# EAGLE board panel-100x70 (EAGLE 6.5.0)
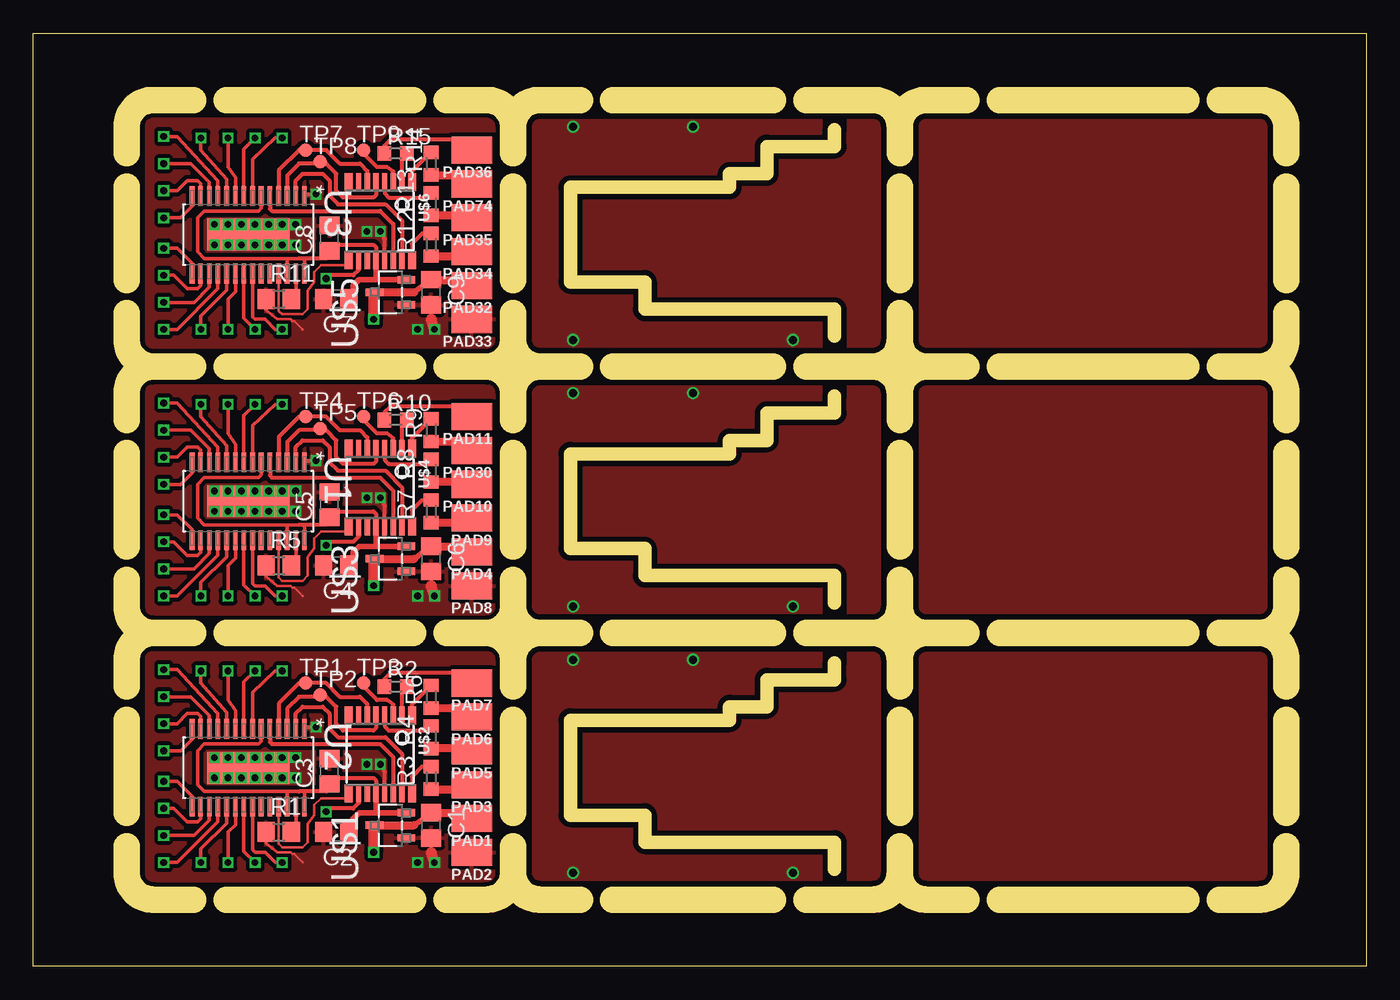
[diagram p0: board, top side]
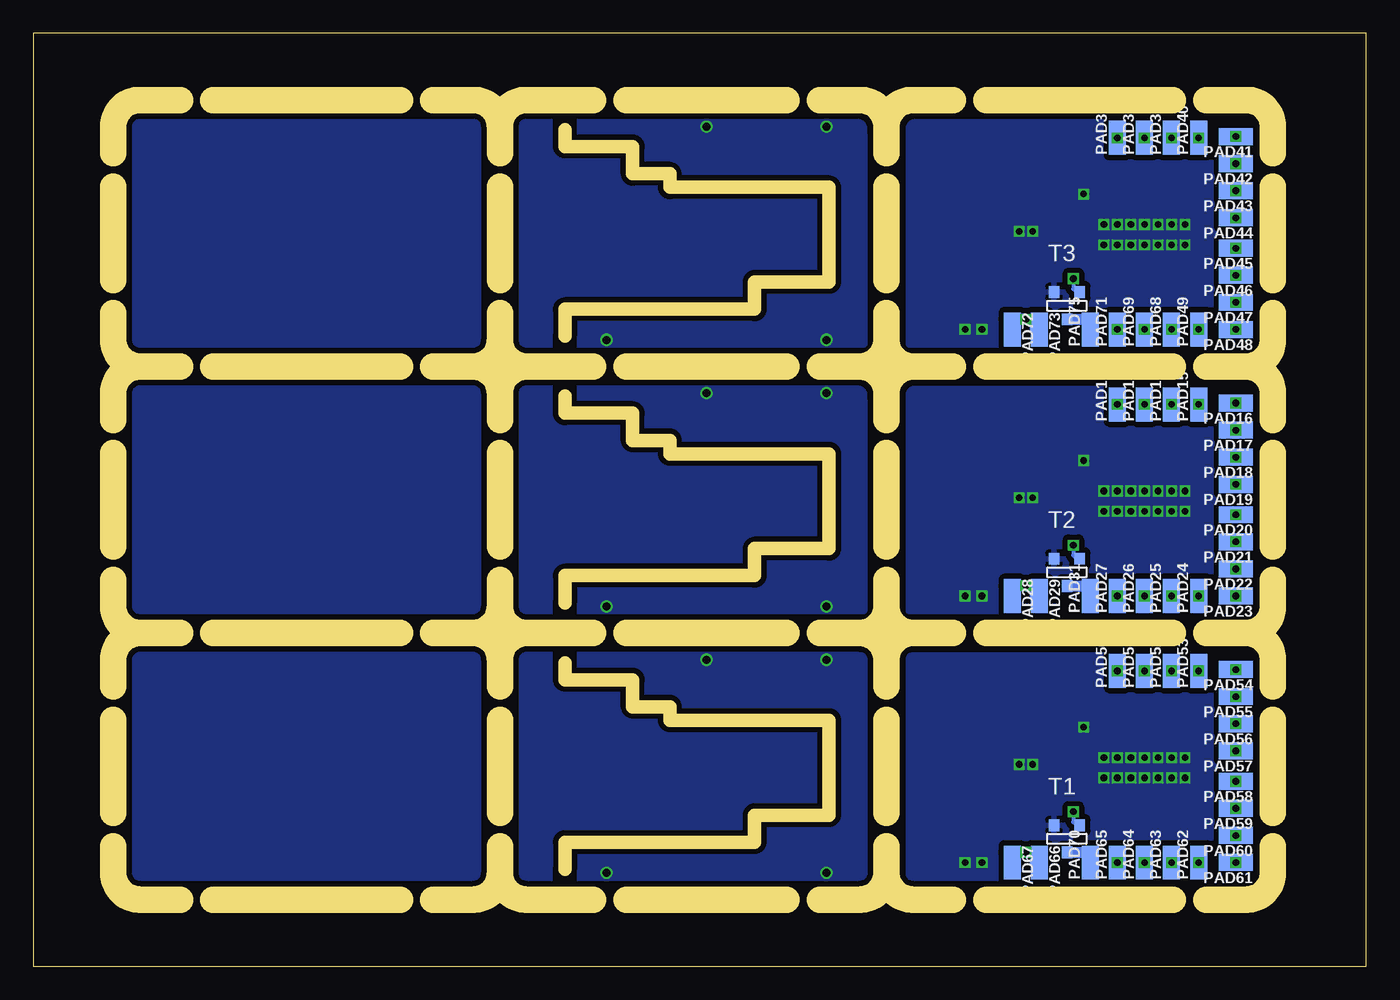
[diagram p1: board, bottom side, seen from below]

Size 100 x 70 mm. Coordinates in mm from the lower left corner, seen from the top.
Outline: 0,0 0,70 100,70 100,0 0,0
Copper layers (1*16): Top 0.035mm / dielectric 1.5mm / Bottom 0.035mm
Design rules "smart-prototyping": minimum track width 7mil, minimum drill 12mil, track to track 7mil, track to pad 7mil, pad to pad 7mil, via to via 7mil, smd to smd 0mil, copper to edge 20mil, drill to drill 10mil, minimum pad ring 10mil, minimum via ring 6mil, stop-mask expansion 2mil, vias tented up to drill 25mil, thermal gap 10mil
tRestrict: 93 lines
bRestrict: 93 lines
Milling: 141 lines

## Footprints (pad centres in the part's own frame; a part is rotated, then mirrored left to right if it is on the bottom)
C0805 = smd 1.3 x 1.5: 1 -0.95,0; 2 0.95,0
SMD80X120 = smd 2.032 x 3.048: 1 0,0
SMD50X100 = smd 1.27 x 2.54: 1 0,0
R0805 = smd 1.3 x 1.5: 1 -0.95,0; 2 0.95,0
R0603 = smd 1 x 1.1: 1 -0.85,0; 2 0.85,0
SOT-23 = smd 0.787 x 0.889: 1 0.025,-1.016; 2 -0.94,1.016; 3 0.991,1.016
TP10R = smd 1 x 1: TP 0,0
SOP65P640X120-29N = smd 1.473 x 0.356: 1 -2.921,4.216; 2 -2.921,3.581; 3 -2.921,2.921; 4 -2.921,2.286; 5 -2.921,1.626; 6 -2.921,0.965; 7 -2.921,0.33; 8 -2.921,-0.33; 9 -2.921,-0.965; 10 -2.921,-1.626; 11 -2.921,-2.286; 12 -2.921,-2.921; 13 -2.921,-3.581; 14 -2.921,-4.216; 15 2.921,-4.216; 16 2.921,-3.581; 17 2.921,-2.921; 18 2.921,-2.286; 19 2.921,-1.626; 20 2.921,-0.965; 21 2.921,-0.33; 22 2.921,0.33; 23 2.921,0.965; 24 2.921,1.626; 25 2.921,2.286; 26 2.921,2.921; 27 2.921,3.581; 28 2.921,4.216 | smd 2.388 x 6.172: 29 0,0
SOT95P300X145-3N = smd 0.559 x 1.321: 1 -0.94,-1.194; 2 0.94,-1.194; 3 0,1.194
TSSOP16 = smd 0.6 x 1.35: 1 -2.375,-2.925; 8 2.375,-2.925; 9 2.375,2.925; 16 -2.375,2.925 | smd 0.4 x 1.35: 2 -1.625,-2.918; 3 -0.975,-2.918; 4 -0.325,-2.918; 5 0.325,-2.918; 6 0.975,-2.918; 7 1.625,-2.918; 10 1.625,2.918; 11 0.975,2.918; 12 0.325,2.918; 13 -0.325,2.918; 14 -0.975,2.925; 15 -1.625,2.925

## Placement (x,y rotation side)
C1  1u  [C0805]  29.84,10.57 270 top
C2  1u  [C0805]  22.73,10.06 180 top
C3  100n  [C0805]  22.22,14.64 90 top
C4  1u  [C0805]  22.73,30.06 180 top
C5  100n  [C0805]  22.22,34.64 90 top
C6  1u  [C0805]  29.84,30.57 270 top
C7  1u  [C0805]  22.73,50.06 180 top
C8  100n  [C0805]  22.22,54.64 90 top
C9  1u  [C0805]  29.84,50.57 270 top
PAD1  +  [SMD80X120]  32.89,11.08 90 top
PAD2  -  [SMD80X120]  32.89,8.54 90 top
PAD3  ST/Rx  [SMD80X120]  32.89,13.62 90 top
PAD4  +  [SMD80X120]  32.89,31.08 90 top
PAD5  TH/Tx  [SMD80X120]  32.89,16.16 90 top
PAD6  CH3  [SMD80X120]  32.89,18.7 90 top
PAD7  OUT/ISP  [SMD80X120]  32.89,21.24 90 top
PAD8  -  [SMD80X120]  32.89,28.54 90 top
PAD9  ST/Rx  [SMD80X120]  32.89,33.62 90 top
PAD10  TH/Tx  [SMD80X120]  32.89,36.16 90 top
PAD11  OUT/ISP  [SMD80X120]  32.89,41.24 90 top
PAD12  [SMD50X100]  18.67,42.16 0 bottom
PAD13  [SMD50X100]  16.64,42.16 0 bottom
PAD14  [SMD50X100]  14.6,42.16 0 bottom
PAD15  [SMD50X100]  12.57,42.16 0 bottom
PAD16  [SMD50X100]  9.78,42.26 90 bottom
PAD17  [SMD50X100]  9.78,40.22 90 bottom
PAD18  [SMD50X100]  9.78,38.19 90 bottom
PAD19  [SMD50X100]  9.78,36.16 90 bottom
PAD20  [SMD50X100]  9.78,33.87 90 bottom
PAD21  [SMD50X100]  9.78,31.84 90 bottom
PAD22  [SMD50X100]  9.78,29.81 90 bottom
PAD23  [SMD50X100]  9.78,27.78 90 bottom
PAD24  [SMD50X100]  12.57,27.78 0 bottom
PAD25  [SMD50X100]  14.6,27.78 0 bottom
PAD26  [SMD50X100]  16.64,27.78 0 bottom
PAD27  [SMD50X100]  18.67,27.78 0 bottom
PAD28  [SMD50X100]  26.55,27.78 180 bottom
PAD29  [SMD50X100]  24.51,27.78 180 bottom
PAD30  CH3  [SMD80X120]  32.89,38.7 90 top
PAD31  [SMD50X100]  20.7,27.78 0 bottom
PAD32  +  [SMD80X120]  32.89,51.08 90 top
PAD33  -  [SMD80X120]  32.89,48.54 90 top
PAD34  ST/Rx  [SMD80X120]  32.89,53.62 90 top
PAD35  TH/Tx  [SMD80X120]  32.89,56.16 90 top
PAD36  OUT/ISP  [SMD80X120]  32.89,61.24 90 top
PAD37  [SMD50X100]  18.67,62.16 0 bottom
PAD38  [SMD50X100]  16.64,62.16 0 bottom
PAD39  [SMD50X100]  14.6,62.16 0 bottom
PAD40  [SMD50X100]  12.57,62.16 0 bottom
PAD41  [SMD50X100]  9.78,62.26 90 bottom
PAD42  [SMD50X100]  9.78,60.22 90 bottom
PAD43  [SMD50X100]  9.78,58.19 90 bottom
PAD44  [SMD50X100]  9.78,56.16 90 bottom
PAD45  [SMD50X100]  9.78,53.87 90 bottom
PAD46  [SMD50X100]  9.78,51.84 90 bottom
PAD47  [SMD50X100]  9.78,49.81 90 bottom
PAD48  [SMD50X100]  9.78,47.78 90 bottom
PAD49  [SMD50X100]  12.57,47.78 0 bottom
PAD50  [SMD50X100]  18.67,22.16 0 bottom
PAD51  [SMD50X100]  16.64,22.16 0 bottom
PAD52  [SMD50X100]  14.6,22.16 0 bottom
PAD53  [SMD50X100]  12.57,22.16 0 bottom
PAD54  [SMD50X100]  9.78,22.26 90 bottom
PAD55  [SMD50X100]  9.78,20.22 90 bottom
PAD56  [SMD50X100]  9.78,18.19 90 bottom
PAD57  [SMD50X100]  9.78,16.16 90 bottom
PAD58  [SMD50X100]  9.78,13.87 90 bottom
PAD59  [SMD50X100]  9.78,11.84 90 bottom
PAD60  [SMD50X100]  9.78,9.81 90 bottom
PAD61  [SMD50X100]  9.78,7.78 90 bottom
PAD62  [SMD50X100]  12.57,7.78 0 bottom
PAD63  [SMD50X100]  14.6,7.78 0 bottom
PAD64  [SMD50X100]  16.64,7.78 0 bottom
PAD65  [SMD50X100]  18.67,7.78 0 bottom
PAD66  [SMD50X100]  24.51,7.78 180 bottom
PAD67  [SMD50X100]  26.55,7.78 180 bottom
PAD68  [SMD50X100]  14.6,47.78 0 bottom
PAD69  [SMD50X100]  16.64,47.78 0 bottom
PAD70  [SMD50X100]  20.7,7.78 0 bottom
PAD71  [SMD50X100]  18.67,47.78 0 bottom
PAD72  [SMD50X100]  26.55,47.78 180 bottom
PAD73  [SMD50X100]  24.51,47.78 180 bottom
PAD74  CH3  [SMD80X120]  32.89,58.7 90 top
PAD75  [SMD50X100]  20.7,47.78 0 bottom
R1  2k0=20mA  [R0805]  18.41,10.06 0 top
R2  1k  [R0603]  27.18,20.99 0 top
R3  1k  [R0603]  29.84,14.13 90 top
R4  1k  [R0603]  29.84,17.18 90 top
R5  2k0=20mA  [R0805]  18.41,30.06 0 top
R6  1k  [R0603]  29.84,20.22 90 top
R7  1k  [R0603]  29.84,34.13 90 top
R8  1k  [R0603]  29.84,37.18 90 top
R9  1k  [R0603]  29.84,40.22 90 top
R10  1k  [R0603]  27.18,40.99 0 top
R11  2k0=20mA  [R0805]  18.41,50.06 0 top
R12  1k  [R0603]  29.84,54.13 90 top
R13  1k  [R0603]  29.84,57.18 90 top
R14  1k  [R0603]  29.84,60.22 90 top
R15  1k  [R0603]  27.18,60.99 0 top
T1  [SOT-23]  22.48,9.56 0 bottom
T2  [SOT-23]  22.48,29.56 0 bottom
T3  [SOT-23]  22.48,49.56 0 bottom
TP1  SWDIO  [TP10R]  20.45,21.24 0 top
TP2  SWCLK  [TP10R]  21.53,20.35 0 top
TP3  RESET  [TP10R]  24.76,21.24 0 top
TP4  SWDIO  [TP10R]  20.45,41.24 0 top
TP5  SWCLK  [TP10R]  21.53,40.35 0 top
TP6  RESET  [TP10R]  24.76,41.24 0 top
TP7  SWDIO  [TP10R]  20.45,61.24 0 top
TP8  SWCLK  [TP10R]  21.53,60.35 0 top
TP9  RESET  [TP10R]  24.76,61.24 0 top
U1  TLC5940PWP  [SOP65P640X120-29N]  16.13,34.89 270 top
U2  TLC5940PWP  [SOP65P640X120-29N]  16.13,14.89 270 top
U3  TLC5940PWP  [SOP65P640X120-29N]  16.13,54.89 270 top
U$1  3V3  [SOT95P300X145-3N]  26.8,10.57 90 top
U$2  LPC812  [TSSOP16]  26.03,15.91 180 top
U$3  3V3  [SOT95P300X145-3N]  26.8,30.57 90 top
U$4  LPC812  [TSSOP16]  26.03,35.91 180 top
U$5  3V3  [SOT95P300X145-3N]  26.8,50.57 90 top
U$6  LPC812  [TSSOP16]  26.03,55.91 180 top

## Library data of the parts
C1-C9 R1-R15 = rcl
PAD1-PAD75 = wirepad
T1-T3 = zetex; OC_FARNELL: unknown; OC_NEWARK: unknown
TP1-TP9 = testpad
U1-U3 = tlc5940; MPN: TLC5940PWP; PACKAGE: HTSSOP-28; SUPPLIER: Texas Instruments
U$1 U$3 U$5 = MCP1703; MPN: MCP1703T-3302E/CB; OC_FARNELL: 1439518; OC_NEWARK: 40M0637; PACKAGE: SOT-3; SUPPLIER: Microchip
U$2 U$4 U$6 = LPC810

## Nets
+3V1: C4.1 C5.1 U1.6 U1.26 U1.28 U$3.2 U$4.12
+3V2: C7.1 C8.1 U3.6 U3.26 U3.28 U$5.2 U$6.12
+3V3: C2.1 C3.1 U2.6 U2.26 U2.28 U$1.2 U$2.12
BLANK: U2.2 U$2.15
BLANK1: U1.2 U$4.15
BLANK2: U3.2 U$6.15
CH1: R9.2 U$4.1
CH2: R14.2 U$6.1
CH3: R6.2 U$2.1
GND3: C1.2 C2.2 C3.2 PAD2.1 R1.1 T1.2 U2.1 U2.29 U$1.1 U$2.13
GND4: C4.2 C5.2 C6.2 PAD8.1 R5.1 T2.2 U1.1 U1.29 U$3.1 U$4.13
GND5: C7.2 C8.2 C9.2 PAD33.1 R11.1 T3.2 U3.1 U3.29 U$5.1 U$6.13
GSCLK: U2.25 U$2.9
GSCLK1: U1.25 U$4.9
GSCLK2: U3.25 U$6.9
IREF: R1.2 U2.27
IREF1: R5.2 U1.27
IREF2: R11.2 U3.27
N$1: PAD6.1 R6.1
N$2: PAD9.1 R7.1
N$3: PAD70.1 T1.1
N$4: TP3.TP U$2.3
N$5: PAD7.1 R2.1
N$6: PAD10.1 R8.1
N$7: PAD30.1 R9.1
N$8: TP6.TP U$4.3
N$9: PAD31.1 T2.1
N$10: PAD11.1 R10.1
N$11: PAD34.1 R12.1
N$12: PAD35.1 R13.1
N$13: PAD74.1 R14.1
N$14: TP9.TP U$6.3
N$15: PAD75.1 T3.1
N$16: PAD36.1 R15.1
N$17: PAD3.1 R3.1
N$18: PAD5.1 R4.1
OUT0: PAD50.1 U2.7
OUT1: PAD51.1 U2.8
OUT2: PAD52.1 U2.9
OUT3: PAD53.1 U2.10
OUT4: PAD54.1 U2.11
OUT5: PAD55.1 U2.12
OUT6: PAD56.1 U2.13
OUT7: PAD57.1 U2.14
OUT8: PAD58.1 U2.15
OUT9: PAD59.1 U2.16
OUT10: PAD60.1 U2.17
OUT11: PAD61.1 U2.18
OUT12: PAD62.1 U2.19
OUT13: PAD63.1 U2.20
OUT14: PAD64.1 U2.21
OUT15: PAD65.1 U2.22
OUT16: PAD12.1 U1.7
OUT17: PAD13.1 U1.8
OUT18: PAD14.1 U1.9
OUT19: PAD15.1 U1.10
OUT20: PAD27.1 U1.22
OUT21: PAD26.1 U1.21
OUT22: PAD25.1 U1.20
OUT23: PAD24.1 U1.19
OUT24: PAD23.1 U1.18
OUT25: PAD22.1 U1.17
OUT26: PAD21.1 U1.16
OUT27: PAD20.1 U1.15
OUT28: PAD19.1 U1.14
OUT29: PAD18.1 U1.13
OUT30: PAD17.1 U1.12
OUT31: PAD16.1 U1.11
OUT32: PAD37.1 U3.7
OUT33: PAD38.1 U3.8
OUT34: PAD39.1 U3.9
OUT35: PAD40.1 U3.10
OUT36: PAD71.1 U3.22
OUT37: PAD69.1 U3.21
OUT38: PAD68.1 U3.20
OUT39: PAD49.1 U3.19
OUT40: PAD48.1 U3.18
OUT41: PAD47.1 U3.17
OUT42: PAD46.1 U3.16
OUT43: PAD45.1 U3.15
OUT44: PAD44.1 U3.14
OUT45: PAD43.1 U3.13
OUT46: PAD42.1 U3.12
OUT47: PAD41.1 U3.11
OUT-SWITCHED: T1.3 U$2.10
OUT-SWITCHED1: T2.3 U$4.10
OUT-SWITCHED2: T3.3 U$6.10
OUT/ISP: R2.2 U$2.2
OUT/ISP1: R10.2 U$4.2
OUT/ISP2: R15.2 U$6.2
SCLK: TP1.TP U2.4 U$2.6
SCLK1: TP4.TP U1.4 U$4.6
SCLK2: TP7.TP U3.4 U$6.6
SIN: U2.5 U$2.14
SIN1: U1.5 U$4.14
SIN2: U3.5 U$6.14
ST/RX: R3.2 U$2.16
ST/RX1: R7.2 U$4.16
ST/RX2: R12.2 U$6.16
TH/TX: R4.2 U$2.4
TH/TX1: R8.2 U$4.4
TH/TX2: R13.2 U$6.4
VIN: C1.1 PAD1.1 PAD66.1 PAD67.1 U$1.3
VIN1: C6.1 PAD4.1 PAD28.1 PAD29.1 U$3.3
VIN2: C9.1 PAD32.1 PAD72.1 PAD73.1 U$5.3
XLAT: TP2.TP U2.3 U$2.5
XLAT1: TP5.TP U1.3 U$4.5
XLAT2: TP8.TP U3.3 U$6.5

## Tracks (layer width: path | path; a pad name or v marks a point on that pad's centre or on a via)
+3V1
  Top 0.254: U1.28 20.34,32.96 20.19,33.11 19.94,33.11 19.18,33.11 | 19.18,33.11 19.05,32.98 U1.26 | 19.18,33.11 12.83,33.11 12.32,33.62 12.32,36.16 12.83,36.67 16.89,36.67 17.09,36.87 U1.6
  Top 0.305: 25.71,31.58 25.78,31.51 | 24,30.38 C4.1 | 22.22,33.37 22.73,34.13 25.53,34.13 25.71,33.95 U$4.12 | 19.94,33.11 21.97,33.11 22.22,33.37 | 22.22,33.37 C5.1
  Top 0.406: U$3.2 25.78,31.51 24.43,31.51 24,31.08 24,30.38 | U$4.12 25.71,31.58
+3V2
  Top 0.254: U3.28 20.34,52.96 20.19,53.11 19.94,53.11 19.18,53.11 | 19.18,53.11 19.05,52.98 U3.26 | 19.18,53.11 12.83,53.11 12.32,53.62 12.32,56.16 12.83,56.67 16.89,56.67 17.09,56.87 U3.6
  Top 0.305: 25.71,51.58 25.78,51.51 | 24,50.38 C7.1 | 22.22,53.37 22.73,54.13 25.53,54.13 25.71,53.95 U$6.12 | 19.94,53.11 21.97,53.11 22.22,53.37 | 22.22,53.37 C8.1
  Top 0.406: U$5.2 25.78,51.51 24.43,51.51 24,51.08 24,50.38 | U$6.12 25.71,51.58
+3V3
  Top 0.254: U2.28 20.34,12.96 20.19,13.11 19.94,13.11 19.18,13.11 | 19.18,13.11 19.05,12.98 U2.26 | 19.18,13.11 12.83,13.11 12.32,13.62 12.32,16.16 12.83,16.67 16.89,16.67 17.09,16.87 U2.6
  Top 0.305: 25.71,11.58 25.78,11.51 | 24,10.38 C2.1 | 22.22,13.37 22.73,14.13 25.53,14.13 25.71,13.95 U$2.12 | 19.94,13.11 21.97,13.11 22.22,13.37 | 22.22,13.37 C3.1
  Top 0.406: U$1.2 25.78,11.51 24.43,11.51 24,11.08 24,10.38 | U$2.12 25.71,11.58
BLANK
  Top 0.305: U2.2 19.68,17.84 19.68,18.95 20.19,19.46 21.72,19.46 22.22,18.95 22.22,17.81 22.86,17.18 26.41,17.18 27.66,15.93 U$2.15
BLANK1
  Top 0.305: U1.2 19.68,37.84 19.68,38.95 20.19,39.46 21.72,39.46 22.22,38.95 22.22,37.81 22.86,37.18 26.41,37.18 27.66,35.93 U$4.15
BLANK2
  Top 0.305: U3.2 19.68,57.84 19.68,58.95 20.19,59.46 21.72,59.46 22.22,58.95 22.22,57.81 22.86,57.18 26.41,57.18 27.66,55.93 U$6.15
CH1
  Top 0.305: U$4.1 28.41,39.64 R9.2
CH2
  Top 0.305: U$6.1 28.41,59.64 R14.2
CH3
  Top 0.305: U$2.1 28.41,19.64 R6.2
GND  (via drill 0.6)
  other vias: 40.5,23 49.5,23 57,7 40.5,7
  pour Top (isolate 0.406): 37,24 37,6 64,6 64,24
  pour Bottom (isolate 0.406): 37,6 64,6 64,24 37,24
GND1  (via drill 0.6)
  other vias: 40.5,43 49.5,43 57,27 40.5,27
  pour Top (isolate 0.406): 37,44 37,26 64,26 64,44
  pour Bottom (isolate 0.406): 37,26 64,26 64,44 37,44
GND2  (via drill 0.6)
  other vias: 40.5,63 49.5,63 57,47 40.5,47
  pour Top (isolate 0.406): 37,64 37,46 64,46 64,64
  pour Bottom (isolate 0.406): 37,46 64,46 64,64 37,64
GND3  (via drill 0.5)
  Top 0.203: 17.46,9.24 18.29,8.54 19.3,8.54 19.43,8.41 19.56,8.41 20.19,7.78
  Top 0.254: R1.1 17.46,9.24
  Top 0.305: U2.1 20.47,17.94 v21.21,17.94 | v15.62,14.13 16.13,14.64 U2.29 | U$2.13 26.36,14.56 26.29,14.64
  Top 0.406: 29.83,9.63 C1.2
  Top 0.813: v30.1,7.78 29.84,8.54
  other vias: 16.64,15.65 17.65,15.65 13.59,15.65 14.6,15.65 15.62,15.65 18.67,15.65 18.67,14.13 17.65,14.13 16.64,14.13 14.6,14.13 13.59,14.13 28.83,7.78 19.68,15.65 19.68,14.13 25.02,15.14 26.03,15.14
  pour Bottom (isolate 0.406): 8,24 35,24 35,6 8,6
  pour Top (isolate 0.305): 8,24 35,24 35,6 8,6
GND4  (via drill 0.5)
  Top 0.203: 17.46,29.24 18.29,28.54 19.3,28.54 19.43,28.41 19.56,28.41 20.19,27.78
  Top 0.254: R5.1 17.46,29.24
  Top 0.305: U1.1 20.47,37.94 v21.21,37.94 | v15.62,34.13 16.13,34.64 U1.29 | U$4.13 26.36,34.56 26.29,34.64
  Top 0.406: 29.83,29.63 C6.2
  Top 0.813: v30.1,27.78 29.84,28.54
  other vias: 16.64,35.65 17.65,35.65 13.59,35.65 14.6,35.65 15.62,35.65 18.67,35.65 18.67,34.13 17.65,34.13 16.64,34.13 14.6,34.13 13.59,34.13 28.83,27.78 19.68,35.65 19.68,34.13 25.02,35.14 26.03,35.14
  pour Bottom (isolate 0.406): 8,44 35,44 35,26 8,26
  pour Top (isolate 0.305): 8,44 35,44 35,26 8,26
GND5  (via drill 0.5)
  Top 0.203: 17.46,49.24 18.29,48.54 19.3,48.54 19.43,48.41 19.56,48.41 20.19,47.78
  Top 0.254: R11.1 17.46,49.24
  Top 0.305: U3.1 20.47,57.94 v21.21,57.94 | v15.62,54.13 16.13,54.64 U3.29 | U$6.13 26.36,54.56 26.29,54.64
  Top 0.406: 29.83,49.63 C9.2
  Top 0.813: v30.1,47.78 29.84,48.54
  other vias: 16.64,55.65 17.65,55.65 13.59,55.65 14.6,55.65 15.62,55.65 18.67,55.65 18.67,54.13 17.65,54.13 16.64,54.13 14.6,54.13 13.59,54.13 28.83,47.78 19.68,55.65 19.68,54.13 25.02,55.14 26.03,55.14
  pour Bottom (isolate 0.406): 8,64 35,64 35,46 8,46
  pour Top (isolate 0.305): 8,64 35,64 35,46 8,46
GSCLK
  Top 0.203: U2.25 18.41,9.18 18.67,8.92 20.19,8.92 20.57,9.3 20.57,10.7 21.08,11.33 21.08,12.1 21.59,12.6 23.66,12.6 U$2.9
GSCLK1
  Top 0.203: U1.25 18.41,29.18 18.67,28.92 20.19,28.92 20.57,29.3 20.57,30.7 21.08,31.33 21.08,32.1 21.59,32.6 23.66,32.6 U$4.9
GSCLK2
  Top 0.203: U3.25 18.41,49.17 18.67,48.92 20.19,48.92 20.57,49.3 20.57,50.7 21.08,51.33 21.08,52.1 21.59,52.6 23.66,52.6 U$6.9
IREF
  Top 0.254: U2.27 19.71,10.11 R1.2
IREF1
  Top 0.254: U1.27 19.71,30.11 R5.2
IREF2
  Top 0.254: U3.27 19.71,50.1 R11.2
N$1
  Top 0.61: R6.1 32.47,19.37 PAD6.1
N$2
  Top 0.406: 32.04,33.02 32.26,33.24 | 32.26,33.24 PAD9.1 | 32.22,33.28 32.26,33.24
  Top 0.61: R7.1 32.22,33.28
N$3
  Bottom 0.813: T1.1 20.7,8.54 PAD70.1
N$4
  Top 0.305: U$2.3 27.01,19.63 26.54,19.97 25.78,19.97 24.76,20.99 TP3.TP
N$5
  Top 0.305: PAD7.1 32.13,22 26.8,22 26.33,21.53 R2.1
N$6
  Top 0.406: R8.1 30.19,36.41
  Top 0.61: PAD10.1 32.73,36.33 R8.1
N$7
  Top 0.61: R9.1 32.47,39.37 PAD30.1
N$8
  Top 0.305: U$4.3 27.01,39.63 26.54,39.97 25.78,39.97 24.76,40.99 TP6.TP
N$9
  Bottom 0.813: T2.1 20.7,28.54 PAD31.1
N$10
  Top 0.305: PAD11.1 32.13,42 26.8,42 26.33,41.53 R10.1
N$11
  Top 0.406: 32.04,53.02 32.26,53.24 | 32.26,53.24 PAD34.1 | 32.22,53.28 32.26,53.24
  Top 0.61: R12.1 32.22,53.28
N$12
  Top 0.406: R13.1 30.19,56.41
  Top 0.61: PAD35.1 32.73,56.33 R13.1
N$13
  Top 0.61: R14.1 32.47,59.37 PAD74.1
N$14
  Top 0.305: U$6.3 27.01,59.63 26.54,59.97 25.78,59.97 24.76,60.99 TP9.TP
N$15
  Bottom 0.813: T3.1 20.7,48.54 PAD75.1
N$16
  Top 0.305: PAD36.1 32.13,62 26.8,62 26.33,61.53 R15.1
N$17
  Top 0.406: 32.04,13.02 32.26,13.24 | 32.26,13.24 PAD3.1 | 32.22,13.28 32.26,13.24
  Top 0.61: R3.1 32.22,13.28
N$18
  Top 0.406: R4.1 30.19,16.41
  Top 0.61: PAD5.1 32.73,16.33 R4.1
OUT0  (via drill 0.5)
  Top 0.254: U2.7 16.46,20.55 18.16,22.16 PAD50.1
  other vias: 18.67,22.16
OUT1  (via drill 0.5)
  Top 0.254: U2.8 15.8,21.32 PAD51.1
  other vias: 16.64,22.16
OUT2  (via drill 0.5)
  Top 0.254: U2.9 15.16,19.16 14.6,19.97 PAD52.1
  other vias: 14.6,22.16
OUT3  (via drill 0.5)
  Top 0.254: U2.10 14.5,19.06 12.57,21.24 PAD53.1
  other vias: 12.57,22.16
OUT4  (via drill 0.5)
  Top 0.254: U2.11 13.84,18.95 10.79,22.26 PAD54.1
  other vias: 9.78,22.26
OUT5  (via drill 0.5)
  Top 0.254: U2.12 13.21,18.83 11.81,20.22 PAD55.1
  other vias: 9.78,20.22
OUT6  (via drill 0.5)
  Top 0.254: U2.13 12.55,18.73 12.32,18.95 11.56,18.95 10.79,18.19 PAD56.1
  other vias: 9.78,18.19
OUT7  (via drill 0.5)
  Top 0.254: U2.14 11.91,17.02 11.05,16.16 PAD57.1
  other vias: 9.78,16.16
OUT8  (via drill 0.5)
  Top 0.254: U2.15 11.91,12.76 10.79,13.87 PAD58.1
  other vias: 9.78,13.87
OUT9  (via drill 0.5)
  Top 0.254: U2.16 12.55,11.05 12.32,10.83 11.56,10.83 10.54,11.84 PAD59.1
  other vias: 9.78,11.84
OUT10  (via drill 0.5)
  Top 0.254: U2.17 13.21,10.95 12.06,9.81 PAD60.1
  other vias: 9.78,9.81
OUT11  (via drill 0.5)
  Top 0.254: U2.18 13.84,10.83 10.79,7.78 PAD61.1
  other vias: 9.78,7.78
OUT12  (via drill 0.5)
  Top 0.254: U2.19 14.5,10.72 12.57,8.79 PAD62.1
  other vias: 12.57,7.78
OUT13  (via drill 0.5)
  Top 0.254: U2.20 15.16,10.62 14.6,10.06 PAD63.1
  other vias: 14.6,7.78
OUT14  (via drill 0.5)
  Top 0.254: U2.21 15.8,8.62 PAD64.1
  other vias: 16.64,7.78
OUT15  (via drill 0.5)
  Top 0.254: U2.22 16.46,8.72 16.64,8.54 17.4,8.54 18.16,7.78 PAD65.1
  other vias: 18.67,7.78
OUT16  (via drill 0.5)
  Top 0.254: U1.7 16.46,40.55 18.16,42.16 PAD12.1
  other vias: 18.67,42.16
OUT17  (via drill 0.5)
  Top 0.254: U1.8 15.8,41.32 PAD13.1
  other vias: 16.64,42.16
OUT18  (via drill 0.5)
  Top 0.254: U1.9 15.16,39.16 14.6,39.97 PAD14.1
  other vias: 14.6,42.16
OUT19  (via drill 0.5)
  Top 0.254: U1.10 14.5,39.06 12.57,41.24 PAD15.1
  other vias: 12.57,42.16
OUT20  (via drill 0.5)
  Top 0.254: U1.22 16.46,28.72 16.64,28.54 17.4,28.54 18.16,27.78 PAD27.1
  other vias: 18.67,27.78
OUT21  (via drill 0.5)
  Top 0.254: U1.21 15.8,28.62 PAD26.1
  other vias: 16.64,27.78
OUT22  (via drill 0.5)
  Top 0.254: U1.20 15.16,30.62 14.6,30.06 PAD25.1
  other vias: 14.6,27.78
OUT23  (via drill 0.5)
  Top 0.254: U1.19 14.5,30.72 12.57,28.79 PAD24.1
  other vias: 12.57,27.78
OUT24  (via drill 0.5)
  Top 0.254: U1.18 13.84,30.83 10.79,27.78 PAD23.1
  other vias: 9.78,27.78
OUT25  (via drill 0.5)
  Top 0.254: U1.17 13.21,30.95 12.06,29.81 PAD22.1
  other vias: 9.78,29.81
OUT26  (via drill 0.5)
  Top 0.254: U1.16 12.55,31.05 12.32,30.83 11.56,30.83 10.54,31.84 PAD21.1
  other vias: 9.78,31.84
OUT27  (via drill 0.5)
  Top 0.254: U1.15 11.91,32.76 10.79,33.87 PAD20.1
  other vias: 9.78,33.87
OUT28  (via drill 0.5)
  Top 0.254: U1.14 11.91,37.02 11.05,36.16 PAD19.1
  other vias: 9.78,36.16
OUT29  (via drill 0.5)
  Top 0.254: U1.13 12.55,38.73 12.32,38.95 11.56,38.95 10.79,38.19 PAD18.1
  other vias: 9.78,38.19
OUT30  (via drill 0.5)
  Top 0.254: U1.12 13.21,38.83 11.81,40.22 PAD17.1
  other vias: 9.78,40.22
OUT31  (via drill 0.5)
  Top 0.254: U1.11 13.84,38.95 10.79,42.26 PAD16.1
  other vias: 9.78,42.26
OUT32  (via drill 0.5)
  Top 0.254: U3.7 16.46,60.55 18.16,62.16 PAD37.1
  other vias: 18.67,62.16
OUT33  (via drill 0.5)
  Top 0.254: U3.8 15.8,61.32 PAD38.1
  other vias: 16.64,62.16
OUT34  (via drill 0.5)
  Top 0.254: U3.9 15.16,59.16 14.6,59.97 PAD39.1
  other vias: 14.6,62.16
OUT35  (via drill 0.5)
  Top 0.254: U3.10 14.5,59.06 12.57,61.24 PAD40.1
  other vias: 12.57,62.16
OUT36  (via drill 0.5)
  Top 0.254: U3.22 16.46,48.72 16.64,48.54 17.4,48.54 18.16,47.78 PAD71.1
  other vias: 18.67,47.78
OUT37  (via drill 0.5)
  Top 0.254: U3.21 15.8,48.62 PAD69.1
  other vias: 16.64,47.78
OUT38  (via drill 0.5)
  Top 0.254: U3.20 15.16,50.62 14.6,50.06 PAD68.1
  other vias: 14.6,47.78
OUT39  (via drill 0.5)
  Top 0.254: U3.19 14.5,50.72 12.57,48.79 PAD49.1
  other vias: 12.57,47.78
OUT40  (via drill 0.5)
  Top 0.254: U3.18 13.84,50.83 10.79,47.78 PAD48.1
  other vias: 9.78,47.78
OUT41  (via drill 0.5)
  Top 0.254: U3.17 13.21,50.95 12.06,49.81 PAD47.1
  other vias: 9.78,49.81
OUT42  (via drill 0.5)
  Top 0.254: U3.16 12.55,51.05 12.32,50.83 11.56,50.83 10.54,51.84 PAD46.1
  other vias: 9.78,51.84
OUT43  (via drill 0.5)
  Top 0.254: U3.15 11.91,52.76 10.79,53.87 PAD45.1
  other vias: 9.78,53.87
OUT44  (via drill 0.5)
  Top 0.254: U3.14 11.91,57.02 11.05,56.16 PAD44.1
  other vias: 9.78,56.16
OUT45  (via drill 0.5)
  Top 0.254: U3.13 12.55,58.73 12.32,58.95 11.56,58.95 10.79,58.19 PAD43.1
  other vias: 9.78,58.19
OUT46  (via drill 0.5)
  Top 0.254: U3.12 13.21,58.83 11.81,60.22 PAD42.1
  other vias: 9.78,60.22
OUT47  (via drill 0.5)
  Top 0.254: U3.11 13.84,58.95 10.79,62.26 PAD41.1
  other vias: 9.78,62.26
OUT-SWITCHED  (via drill 0.5)
  Top 0.305: U$2.10 24.41,12.25 24,11.84 22.22,11.84 v21.97,11.59
  Bottom 0.305: v21.97,11.59 21.97,10.83 21.72,10.57 T1.3
OUT-SWITCHED1  (via drill 0.5)
  Top 0.305: U$4.10 24.41,32.25 24,31.84 22.22,31.84 v21.97,31.59
  Bottom 0.305: v21.97,31.59 21.97,30.83 21.72,30.57 T2.3
OUT-SWITCHED2  (via drill 0.5)
  Top 0.305: U$6.10 24.41,52.25 24,51.84 22.22,51.84 v21.97,51.59
  Bottom 0.305: v21.97,51.59 21.97,50.83 21.72,50.57 T3.3
OUT/ISP
  Top 0.305: U$2.2 27.66,20.62 R2.2
OUT/ISP1
  Top 0.305: U$4.2 27.66,40.62 R10.2
OUT/ISP2
  Top 0.305: U$6.2 27.66,60.62 R15.2
S$1
  pour Top (isolate 0.406): 66,64 93,64 93,46 66,46
  pour Bottom (isolate 0.406): 66,64 93,64 93,46 66,46
S$2
  pour Top (isolate 0.406): 66,44 93,44 93,26 66,26
  pour Bottom (isolate 0.406): 66,44 93,44 93,26 66,26
S$3
  pour Top (isolate 0.406): 66,24 93,24 93,6 66,6
  pour Bottom (isolate 0.406): 66,24 93,24 93,6 66,6
SCLK
  Top 0.305: U2.4 18.41,19.72 19.94,21.24 TP1.TP 21.97,21.24 22.99,20.22 24.51,20.22 25.06,19.68 U$2.6
SCLK1
  Top 0.305: U1.4 18.41,39.72 19.94,41.24 TP4.TP 21.97,41.24 22.99,40.22 24.51,40.22 25.06,39.67 U$4.6
SCLK2
  Top 0.305: U3.4 18.41,59.72 19.94,61.24 TP7.TP 21.97,61.24 22.99,60.22 24.51,60.22 25.06,59.67 U$6.6
SIN
  Top 0.305: U2.5 17.75,16.82 17.91,16.67 26.03,16.67 27.01,15.69 U$2.14
SIN1
  Top 0.305: U1.5 17.75,36.82 17.91,36.67 26.03,36.67 27.01,35.69 U$4.14
SIN2
  Top 0.305: U3.5 17.75,56.82 17.91,56.67 26.03,56.67 27.01,55.69 U$6.14
ST/RX
  Top 0.305: U$2.16 28.41,14.22 29.17,14.98 R3.2
ST/RX1
  Top 0.305: U$4.16 28.41,34.22 29.17,34.98 R7.2
ST/RX2
  Top 0.305: U$6.16 28.41,54.22 29.17,54.98 R12.2
TH/TX
  Top 0.305: U$2.4 26.36,17.99 26.67,17.68 29.5,17.68 R4.2
TH/TX1
  Top 0.305: U$4.4 26.36,37.99 26.67,37.68 29.5,37.68 R8.2
TH/TX2
  Top 0.305: U$6.4 26.36,57.99 26.67,57.68 29.5,57.68 R13.2
VIN  (via drill 0.5)
  Top 0.305: 29.46,11.46 29.78,11.78 C1.1 | 32,11.46 32.64,11.46 PAD1.1
  Top 0.406: 28.57,10.57 C1.1
  Top 0.61: 28.57,10.57 U$1.3 25.53,10.5 | 32,11.46 29.46,11.46
  Top 0.813: 25.53,10.5 v25.53,8.54
  Bottom 0.813: 24.85,7.86 24.76,7.86 PAD66.1 24.76,8.54 v25.53,8.54 26.8,8.54 PAD67.1
VIN1  (via drill 0.5)
  Top 0.305: 29.46,31.46 29.78,31.78 C6.1 | 32,31.46 32.64,31.46 PAD4.1
  Top 0.406: 28.57,30.57 C6.1
  Top 0.61: 28.57,30.57 U$3.3 25.53,30.5 | 32,31.46 29.46,31.46
  Top 0.813: 25.53,30.5 v25.53,28.54
  Bottom 0.813: 24.85,27.86 24.76,27.86 PAD29.1 24.76,28.54 v25.53,28.54 26.8,28.54 PAD28.1
VIN2  (via drill 0.5)
  Top 0.305: 29.46,51.46 29.78,51.78 C9.1 | 32,51.46 32.64,51.46 PAD32.1
  Top 0.406: 28.57,50.57 C9.1
  Top 0.61: 28.57,50.57 U$5.3 25.53,50.5 | 32,51.46 29.46,51.46
  Top 0.813: 25.53,50.5 v25.53,48.54
  Bottom 0.813: 24.85,47.86 24.76,47.86 PAD73.1 24.76,48.54 v25.53,48.54 26.8,48.54 PAD72.1
XLAT
  Top 0.305: 21.46,20.22 21.97,20.22 22.73,19.46 22.73,18.19 23.24,17.68 25.53,17.68 25.71,17.87 U$2.5 | 21.46,20.22 19.94,20.22 19.05,19.34 U2.3 | 21.46,20.22 21.27,20.16 21.4,20.16 TP2.TP
XLAT1
  Top 0.305: 21.46,40.22 21.97,40.22 22.73,39.46 22.73,38.19 23.24,37.68 25.53,37.68 25.71,37.87 U$4.5 | 21.46,40.22 19.94,40.22 19.05,39.34 U1.3 | 21.46,40.22 21.27,40.16 21.4,40.16 TP5.TP
XLAT2
  Top 0.305: 21.46,60.22 21.97,60.22 22.73,59.46 22.73,58.19 23.24,57.68 25.53,57.68 25.71,57.87 U$6.5 | 21.46,60.22 19.94,60.22 19.05,59.34 U3.3 | 21.46,60.22 21.27,60.16 21.4,60.16 TP8.TP

## Text on the board
tValues: . | LANE Boys RC | OUT/ISP | . | RC car light controller | CH3 | TLC5940 + LPC812 | TH/Tx | http://goo.gl/Vif9VM | ST/Rx | + | - | Rev 1 | . | LANE Boys RC | OUT/ISP | . | RC car light controller | CH3 | TLC5940 + LPC812 | TH/Tx | http://goo.gl/Vif9VM | ST/Rx | + | - | Rev 1 | . | LANE Boys RC | OUT/ISP | . | RC car light controller | CH3 | TLC5940 + LPC812 | TH/Tx | http://goo.gl/Vif9VM | ST/Rx | + | - | Rev 1
bValues: 5 | 3 | 2 | 1 | 0 | 6 | LANE Boys RC | 7 | RC light controller | 8 | 9 | 10 | 12 | 13 | 14 | 15 | +LED | 4...10V | 5 | 3 | 2 | 1 | 0 | 6 | LANE Boys RC | 7 | RC light controller | 8 | 9 | 10 | 12 | 13 | 14 | 15 | +LED | 4...10V | 5 | 3 | 2 | 1 | 0 | 6 | LANE Boys RC | 7 | RC light controller | 8 | 9 | 10 | 12 | 13 | 14 | 15 | +LED | 4...10V